# Altium PCB Tray2.PcbDoc (part 5 of 6)
Units mil, origin at the board's own origin, x right, y up, seen from the top; angles counter-clockwise.
Board outline 6000 x 4000 mil, 2 copper layers (Top Layer, Bottom Layer); 418 components, 415 nets, 1799 pads, 870 vias.
Unrouted connection lines stored in the file: 363.
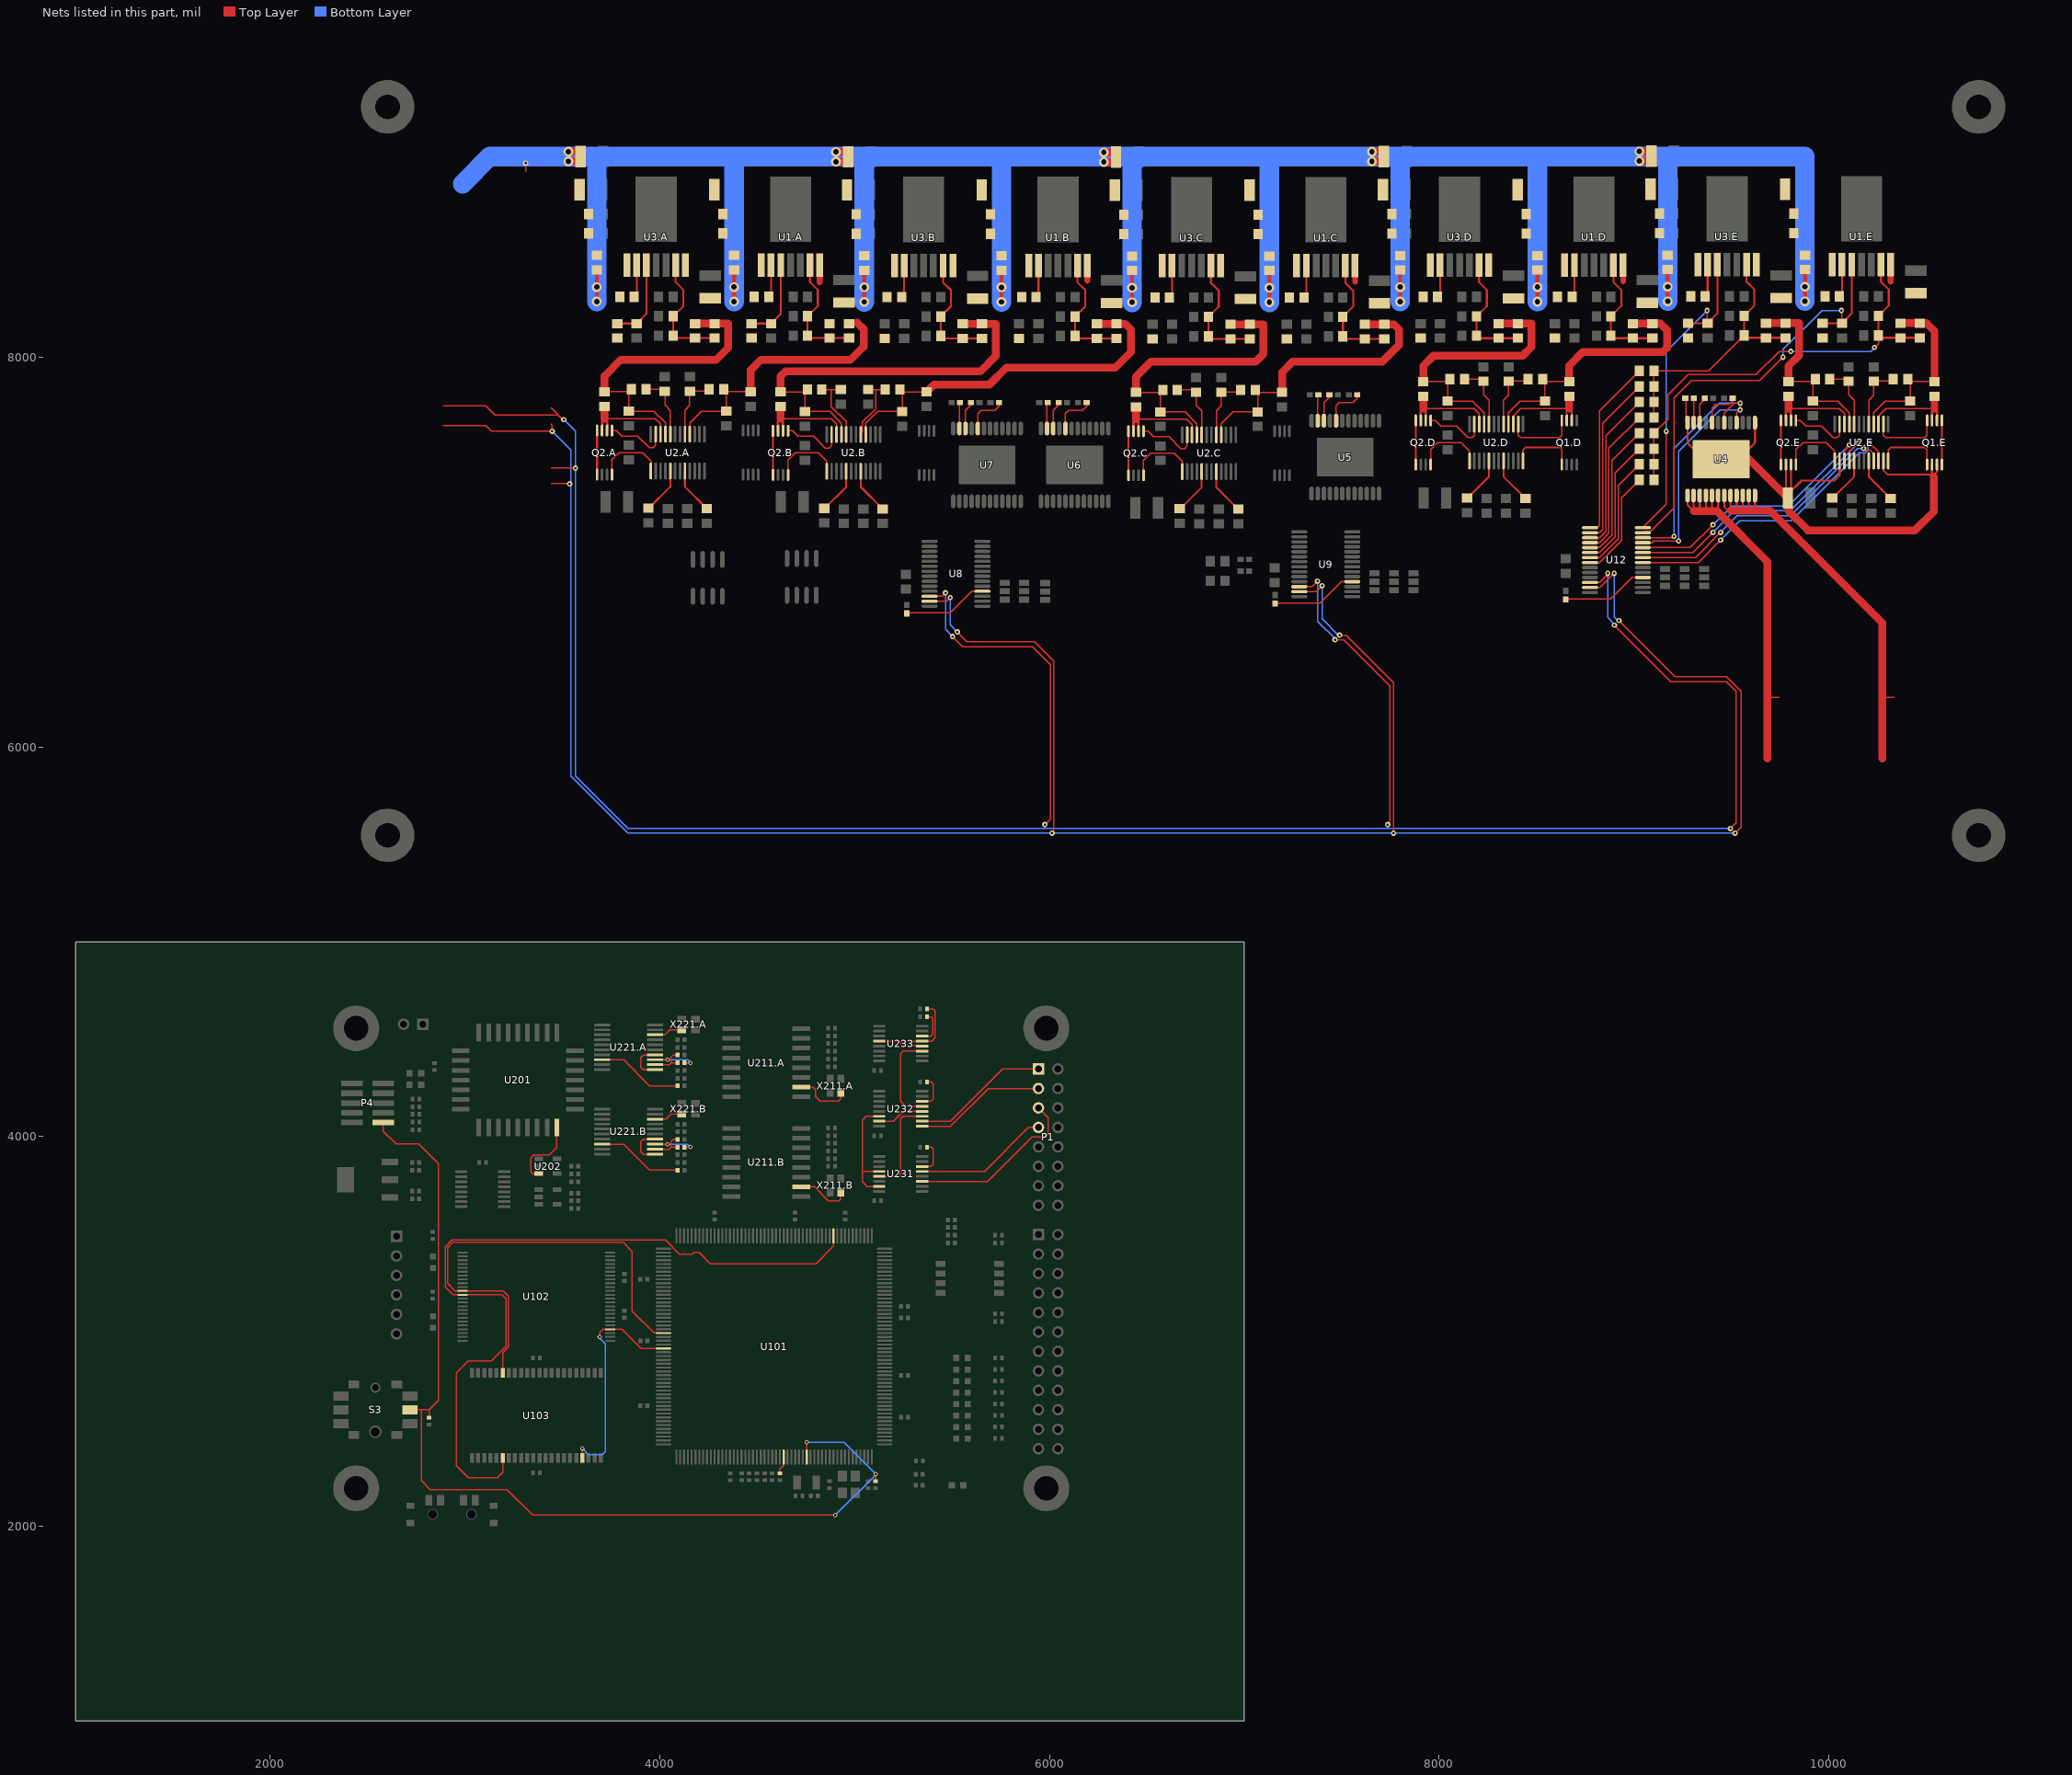
[diagram p5: the nets of this part, all layers, seen from the top]

## Via types
v1: diameter 21.65, hole 11.81, Top Layer to Bottom Layer, tented both sides, 370 vias
v2: diameter 27.56, hole 11.81, Top Layer to Bottom Layer, tented both sides, 231 vias
v3: diameter 27.56, hole 11.81, Top Layer to Bottom Layer, tented bottom, 120 vias
v4: diameter 25.98, hole 12.99, Top Layer to Bottom Layer, tented both sides, 96 vias
v5: diameter 50, hole 28, Top Layer to Bottom Layer, tented both sides, 40 vias
v6: diameter 21.65, hole 13.78, Top Layer to Bottom Layer, 13 vias

## Nets (pads, with @x,y where several pads share a name; then routed paths per layer and width w, separated by ;. In a path a pad name is that pad's centre, name@x,y a point inside that pad or via, vN(x,y) a via of type N, cw(c..) or ccw(c..) an arc to the next point about the centre after c; other vN are vias at no path point) (continued)
NetQ1.D_G1: Q1.D.G1 U2.D.2 | length 367.7
  Top Layer w8: U2.D.2@8407.18,7658.19 8407.18,7601.2 8419.69,7588.7 8619.69,7588.7 8631.3,7600.31 Q1.D.G1@8631.3,7676.89
NetQ1.D_G2: Q1.D.G2 U2.D.24 | length 342.7
  Top Layer w8: U2.D.24@8432.18,7469.21 8432.19,7526.2 8444.69,7538.7 8619.69,7538.7 8631.3,7527.09 Q1.D.G2@8631.3,7450.51
NetQ1.D_S1: Q1.D.S1 R1.D.2 U2.D.3 | length 542.9
  Top Layer w6: U2.D.3@8382.18,7658.19 8382.18,7701.2 8419.68,7738.7 8669.68,7738.7
  Top Layer w10: Q1.D.S1@8656.89,7676.89 8656.89,7725.91 8669.68,7738.7 8682.48,7725.91 Q1.D.S1@8682.48,7676.89
  Top Layer w40: 8669.68,7738.7 R1.D.2@8669.68,7801.3
NetQ1.E_D1: Q1.E.D1 Q1.E.D2 | length 226.4
  Top Layer w10: Q1.E.D2@10583.15,7450.51 Q1.E.D1@10583.15,7676.89
NetQ1.E_G1: Q1.E.G1 U2.E.2 | length 367.7
  Top Layer w8: U2.E.2@10282.27,7658.19 10282.26,7601.2 10294.77,7588.7 10494.77,7588.7 10506.38,7600.32 Q1.E.G1@10506.38,7676.89
NetQ1.E_G2: Q1.E.G2 U2.E.24 | length 342.7
  Top Layer w8: U2.E.24@10307.27,7469.21 10307.27,7526.2 10319.77,7538.7 10494.77,7538.7 10506.38,7527.09 Q1.E.G2@10506.38,7450.51
NetQ1.E_S1: Q1.E.S1 R1.E.2 U2.E.3 | length 542.9
  Top Layer w6: U2.E.3@10257.27,7658.19 10257.26,7701.2 10294.76,7738.7 10544.76,7738.7
  Top Layer w10: Q1.E.S1@10531.97,7676.89 10531.97,7725.91 10544.76,7738.7 10557.56,7725.91 Q1.E.S1@10557.56,7676.89
  Top Layer w40: 10544.76,7738.7 R1.E.2@10544.76,7801.3
NetQ2.A_D1: Q2.A.D1 Q2.A.D2 | length 231.4
  Top Layer w10: Q2.A.D1@3677.8,7398.94 Q2.A.D2@3677.8,7630.32
NetQ2.A_G1: Q2.A.G1 U2.A.13 | length 360.4
  Top Layer w6: Q2.A.G1@3754.57,7398.94 3754.57,7475.51 3791.18,7512.13 3911.18,7512.13 3953.68,7469.63 U2.A.13@3953.68,7417.64
NetQ2.A_G2: Q2.A.G2 U2.A.11 | length 322.8
  Top Layer w6: Q2.A.G2@3754.57,7625.31 3777.99,7625.32 3806.18,7597.13 3886.18,7597.13 3946.18,7537.13 3966.18,7537.13 3978.68,7549.63 U2.A.11@3978.68,7606.61
NetQ2.A_S2: Q2.A.S2 R12.A.2 U2.A.10 | length 548.7
  Top Layer w6: 3716.18,7687.13 3976.18,7687.13 4003.68,7659.63 U2.A.10@4003.68,7606.61
  Top Layer w12: Q2.A.S2@3703.39,7625.31 3703.39,7674.33 3716.18,7687.13 3728.98,7674.33 Q2.A.S2@3728.98,7625.31
  Top Layer w40: 3716.18,7687.13 R12.A.2@3716.18,7749.73
NetQ2.B_D1: Q2.B.D1 Q2.B.D2 | length 231.4
  Top Layer w10: Q2.B.D1@4581.14,7397.44 Q2.B.D2@4581.14,7628.82
NetQ2.B_G1: Q2.B.G1 U2.B.13 | length 360.4
  Top Layer w6: Q2.B.G1@4657.91,7397.44 4657.92,7474.02 4694.53,7510.63 4814.53,7510.63 4857.03,7468.13 U2.B.13@4857.03,7416.14
NetQ2.B_G2: Q2.B.G2 U2.B.11 | length 322.8
  Top Layer w6: Q2.B.G2@4657.91,7623.82 4681.34,7623.82 4709.53,7595.63 4789.53,7595.63 4849.53,7535.63 4869.53,7535.63 4882.03,7548.13 U2.B.11@4882.03,7605.12
NetQ2.B_S2: Q2.B.S2 R12.B.2 U2.B.10 | length 548.7
  Top Layer w6: 4619.53,7685.63 4879.53,7685.63 4907.03,7658.13 U2.B.10@4907.03,7605.12
  Top Layer w12: Q2.B.S2@4606.73,7623.82 4606.73,7672.84 4619.53,7685.63 4632.32,7672.84 Q2.B.S2@4632.32,7623.82
  Top Layer w40: 4619.53,7685.63 R12.B.2@4619.53,7748.23
NetQ2.C_D1: Q2.C.D1 Q2.C.D2 | length 231.4
  Top Layer w10: Q2.C.D1@6406.38,7395.51 Q2.C.D2@6406.38,7626.89
NetQ2.C_G1: Q2.C.G1 U2.C.13 | length 360.4
  Top Layer w6: Q2.C.G1@6483.15,7395.51 6483.15,7472.09 6519.77,7508.7 6639.77,7508.7 6682.27,7466.2 U2.C.13@6682.27,7414.21
NetQ2.C_G2: Q2.C.G2 U2.C.11 | length 322.8
  Top Layer w6: Q2.C.G2@6483.15,7621.89 6506.57,7621.89 6534.76,7593.7 6614.77,7593.7 6674.77,7533.7 6694.77,7533.7 6707.27,7546.2 U2.C.11@6707.27,7603.19
NetQ2.C_S2: Q2.C.S2 R12.C.2 U2.C.10 | length 548.7
  Top Layer w6: 6444.76,7683.7 6704.76,7683.7 6732.26,7656.2 U2.C.10@6732.27,7603.19
  Top Layer w12: Q2.C.S2@6431.97,7621.89 6431.97,7670.91 6444.76,7683.7 6457.56,7670.91 Q2.C.S2@6457.56,7621.89
  Top Layer w40: 6444.76,7683.7 R12.C.2@6444.76,7746.3
NetQ2.D_D1: Q2.D.D1 Q2.D.D2 | length 231.4
  Top Layer w10: Q2.D.D1@7881.3,7450.51 Q2.D.D2@7881.3,7681.89
NetQ2.D_G1: Q2.D.G1 U2.D.13 | length 360.4
  Top Layer w6: Q2.D.G1@7958.07,7450.51 7958.07,7527.09 7994.69,7563.7 8114.69,7563.7 8157.19,7521.2 U2.D.13@8157.18,7469.21
NetQ2.D_G2: Q2.D.G2 U2.D.11 | length 322.8
  Top Layer w6: Q2.D.G2@7958.07,7676.89 7981.49,7676.89 8009.68,7648.7 8089.69,7648.7 8149.69,7588.7 8169.69,7588.7 8182.19,7601.2 U2.D.11@8182.18,7658.19
NetQ2.D_S2: Q2.D.S2 R12.D.2 U2.D.10 | length 548.7
  Top Layer w6: 7919.68,7738.7 8179.68,7738.7 8207.18,7711.2 U2.D.10@8207.18,7658.19
  Top Layer w12: Q2.D.S2@7906.89,7676.89 7906.89,7725.9 7919.68,7738.7 7932.48,7725.9 Q2.D.S2@7932.48,7676.89
  Top Layer w40: 7919.68,7738.7 R12.D.2@7919.68,7801.3
NetQ2.E_D1: Q2.E.D1 Q2.E.D2 | length 231.4
  Top Layer w10: Q2.E.D1@9756.38,7450.51 Q2.E.D2@9756.38,7681.89
NetQ2.E_G1: Q2.E.G1 U2.E.13 | length 360.4
  Top Layer w6: Q2.E.G1@9833.15,7450.51 9833.15,7527.09 9869.77,7563.7 9989.77,7563.7 10032.27,7521.2 U2.E.13@10032.27,7469.21
NetQ2.E_G2: Q2.E.G2 U2.E.11 | length 322.8
  Top Layer w6: Q2.E.G2@9833.15,7676.89 9856.57,7676.89 9884.76,7648.7 9964.77,7648.7 10024.77,7588.7 10044.77,7588.7 10057.27,7601.2 U2.E.11@10057.27,7658.19
NetQ2.E_S2: Q2.E.S2 R12.E.2 U2.E.10 | length 548.7
  Top Layer w6: 9794.76,7738.7 10054.76,7738.7 10082.26,7711.2 U2.E.10@10082.27,7658.19
  Top Layer w12: Q2.E.S2@9781.97,7676.89 9781.97,7725.91 9794.76,7738.7 9807.56,7725.91 Q2.E.S2@9807.56,7676.89
  Top Layer w40: 9794.76,7738.7 R12.E.2@9794.76,7801.3
NetR2.A_2: R2.A.2 R3.A.2 U2.A.5 | length 316
  Top Layer w6: U2.A.5@4128.68,7606.61 4128.68,7729.63 4153.58,7754.53 4153.58,7827.13 R2.A.2@4238.78,7827.13
NetR2.B_2: R2.B.2 R3.B.2 U2.B.5 | length 364.1
  Top Layer w6: U2.B.5@5032.03,7605.12 5026.5,7605.12 5041.14,7619.76 5041.14,7669.83 5105.26,7733.95 5105.26,7734.28 5109.69,7738.7 5109.69,7835.63 ; R3.B.2@5069.69,7829.5 R3.B.2@5069.69,7836.1 ; R3.B.2@5070.16,7835.63 5109.69,7835.63 ; R2.B.2@5157.13,7835.63 5109.69,7835.63
NetR2.C_2: R2.C.2 R3.C.2 U2.C.5 | length 316
  Top Layer w6: U2.C.5@6857.27,7603.19 6857.26,7726.2 6882.17,7751.1 6882.17,7823.7 R2.C.2@6967.36,7823.7
NetR2.D_2: R2.D.2 R3.D.2 U2.D.5 | length 316
  Top Layer w6: U2.D.5@8332.18,7658.19 8332.18,7781.2 8357.09,7806.1 8357.09,7878.7 R2.D.2@8442.28,7878.7
NetR2.E_2: R2.E.2 R3.E.2 U2.E.5 | length 316
  Top Layer w6: U2.E.5@10207.27,7658.19 10207.26,7781.2 10232.17,7806.1 10232.17,7878.7 R2.E.2@10317.36,7878.7
NetR4.A_1: R4.A.1 U1.A.2 | length 167.6
  Top Layer w10: R4.A.1@4558.58,8312.13 4571.18,8324.73 U1.A.2@4571.18,8474.53
NetR4.B_1: R4.B.1 U1.B.2 | length 167.6
  Top Layer w10: R4.B.1@5931.93,8310.63 5944.53,8323.23 U1.B.2@5944.53,8473.03
NetR4.C_1: R4.C.1 U1.C.2 | length 167.6
  Top Layer w10: R4.C.1@7307.17,8308.7 7319.77,8321.3 U1.C.2@7319.76,8471.1
NetR4.D_1: R4.D.1 U1.D.2 | length 167.6
  Top Layer w10: R4.D.1@8683.54,8311.77 8696.14,8324.37 U1.D.2@8696.14,8474.17
NetR4.E_1: R4.E.1 U1.E.2 | length 167.6
  Top Layer w10: R4.E.1@10057.17,8313.7 10069.77,8326.3 U1.E.2@10069.76,8476.1
NetR10.A_2: R10.A.2 R11.A.2 U2.A.8 | length 320.2
  Top Layer w6: R11.A.2@3943.58,7837.13 4018.78,7837.13 4026.18,7829.73 4026.18,7757.13 4053.68,7729.63 U2.A.8@4053.68,7606.61
NetR10.B_2: R10.B.2 R11.B.2 U2.B.8 | length 354.8
  Top Layer w6: R11.B.2@4846.93,7835.63 4879.69,7835.63 ; R10.B.2@4929.53,7828.23 4922.13,7835.63 4879.69,7835.63 ; R10.B.2@4929.53,7829.5 R10.B.2@4929.53,7836.1 ; U2.B.8@4957.03,7605.12 4957.03,7670.87 4879.69,7748.22 4879.69,7835.63
NetR10.C_2: R10.C.2 R11.C.2 U2.C.8 | length 320.2
  Top Layer w6: R11.C.2@6672.17,7833.7 6747.36,7833.7 6754.76,7826.3 6754.76,7753.7 6782.26,7726.2 U2.C.8@6782.27,7603.19
NetR10.D_2: R10.D.2 R11.D.2 U2.D.8 | length 320.2
  Top Layer w6: R11.D.2@8147.09,7888.7 8222.28,7888.7 8229.68,7881.3 8229.68,7808.7 8257.18,7781.2 U2.D.8@8257.18,7658.19
NetR10.E_2: R10.E.2 R11.E.2 U2.E.8 | length 320.2
  Top Layer w6: R11.E.2@10022.17,7888.7 10097.36,7888.7 10104.76,7881.3 10104.76,7808.7 10132.26,7781.2 U2.E.8@10132.27,7658.19
NetR13.A_1: R13.A.1 U3.A.2 | length 175
  Top Layer w10: R13.A.1@3868.58,8312.13 3881.18,8312.13 U3.A.2@3881.18,8474.53
NetR13.B_1: R13.B.1 U3.B.2 | length 175
  Top Layer w10: R13.B.1@5241.93,8310.63 5254.53,8310.63 U3.B.2@5254.53,8473.03
NetR13.C_1: R13.C.1 U3.C.2 | length 175
  Top Layer w10: R13.C.1@6617.17,8308.7 6629.76,8308.7 U3.C.2@6629.76,8471.1
NetR13.D_1: R13.D.1 U3.D.2 | length 175
  Top Layer w10: R13.D.1@7993.54,8311.77 8006.14,8311.77 U3.D.2@8006.14,8474.17
NetR13.E_1: R13.E.1 U3.E.2 | length 175
  Top Layer w10: R13.E.1@9367.17,8313.7 9379.76,8313.7 U3.E.2@9379.76,8476.1
NetR19_2: R19.2 U4.CS_DIS | length 129.6
  Top Layer w6: U4.CS_DIS@9307.95,7665.71 R19.2@9307.95,7795.31
NetR20_2: R20.2 U5.CS_DIS | length 129.6
  Top Layer w6: U5.CS_DIS@7377.95,7675.71 R20.2@7377.95,7805.31
NetR21_1: R21.1 U4.CS2 | length 144.8
  Top Layer w6: U4.CS2@9339.45,7665.71 9339.45,7758.46 9368.03,7787.05 R21.1@9368.03,7798.7
NetR22_1: R22.1 U4.CS1 | length 219.1
  Top Layer w6: U4.CS1@9402.44,7665.71 9402.44,7741.46 9419.69,7758.7 9489.69,7758.7 9511.34,7780.35 R22.1@9511.34,7798.7
NetR23_1: R23.1 U5.CS2 | length 144.8
  Top Layer w6: U5.CS2@7409.45,7675.71 7409.45,7768.46 7438.03,7797.05 R23.1@7438.03,7808.7
NetR24_1: R24.1 U5.CS1 | length 219.1
  Top Layer w6: U5.CS1@7472.44,7675.71 7472.44,7751.46 7489.69,7768.7 7559.69,7768.7 7581.34,7790.35 R24.1@7581.34,7808.7
NetR25_2: R25.2 U6.CS_DIS | length 129.6
  Top Layer w6: U6.CS_DIS@5987.95,7635.71 R25.2@5987.95,7765.31
NetR26_2: R26.2 U7.CS_DIS | length 129.6
  Top Layer w6: U7.CS_DIS@5537.95,7635.71 R26.2@5537.95,7765.31
NetR27_1: R27.1 U6.CS2 | length 144.8
  Top Layer w6: U6.CS2@6019.45,7635.71 6019.45,7728.46 6048.03,7757.05 R27.1@6048.03,7768.7
NetR28_1: R28.1 U6.CS1 | length 219.1
  Top Layer w6: U6.CS1@6082.44,7635.71 6082.44,7711.46 6099.69,7728.7 6169.69,7728.7 6191.34,7750.35 R28.1@6191.34,7768.7
NetR29_1: R29.1 U7.CS2 | length 144.8
  Top Layer w6: U7.CS2@5569.45,7635.71 5569.45,7728.46 5598.03,7757.05 R29.1@5598.03,7768.7
NetR30_1: R30.1 U7.CS1 | length 219.1
  Top Layer w6: U7.CS1@5632.44,7635.71 5632.44,7711.46 5649.69,7728.7 5719.69,7728.7 5741.34,7750.35 R30.1@5741.34,7768.7
NetR31_2: R31.2 U8.18 | length 442.3
  Top Layer w6: R31.2@5260.63,6687.99 5262.28,6689.65 5490.63,6689.65 5601.06,6800.08 U8.18@5656.46,6800.08
NetR32_2: R32.2 U9.18 | length 442.3
  Top Layer w6: R32.2@7159.45,6737.05 7161.1,6738.7 7389.45,6738.7 7499.88,6849.13 U9.18@7555.28,6849.13
NetR35_1: R35.1 U12.7 | length 612.4
  Top Layer w6: U12.7@8775.99,6972.92 8824.8,6972.92 8921.01,7069.12 8921.01,7343.09 R35.1@9029.61,7451.69
NetR36_1: R36.1 U12.8 | length 558
  Top Layer w6: U12.8@8775.99,6947.33 8824.8,6947.33 8937.01,7059.53 8937.01,7240.67 8937.01,7279.09 R36.1@9029.61,7371.69
NetR37_1: R37.1 U12.6 | length 666.8
  Top Layer w6: U12.6@8775.99,6998.51 8824.8,6998.51 8905.01,7078.71 8905.01,7407.09 R37.1@9029.61,7531.69
NetR38_1: R38.1 U12.5 | length 721.2
  Top Layer w6: U12.5@8775.99,7024.1 8824.8,7024.1 8889.01,7088.3 8889.01,7471.09 R38.1@9029.61,7611.69
NetR39_1: R39.1 U12.4 | length 775.6
  Top Layer w6: U12.4@8775.99,7049.69 8824.8,7049.69 8873.01,7097.89 8873.01,7535.09 R39.1@9029.61,7691.69
NetR40_1: R40.1 U12.3 | length 830.1
  Top Layer w6: U12.3@8775.99,7075.28 8824.8,7075.28 8857.01,7107.48 8857.01,7599.09 R40.1@9029.61,7771.69
NetR41_1: R41.1 U12.2 | length 884.5
  Top Layer w6: U12.2@8775.99,7100.87 8824.8,7100.87 8841.01,7117.07 8841.01,7663.09 R41.1@9029.61,7851.69
NetR42_1: R42.1 U12.1 | length 931.8
  Top Layer w6: U12.1@8775.99,7126.46 8812.77,7126.46 8825.01,7138.69 8825.01,7710.02 8825.01,7727.09 R42.1@9029.61,7931.69
NetR43_2: R43.2 U12.18 | length 442.3
  Top Layer w6: R43.2@8651.82,6758.47 8653.47,6760.12 8881.82,6760.12 8992.25,6870.55 U12.18@9047.65,6870.55
NetR44.A_1: R44.A.1 U2.A.20 | length 239.7
  Top Layer w10: U2.A.20@4128.68,7417.64 4128.68,7337.03 R44.A.1@4241.18,7224.53
NetR44.B_1: R44.B.1 U2.B.20 | length 239.7
  Top Layer w10: U2.B.20@5032.03,7416.14 5032.03,7335.53 R44.B.1@5144.53,7223.03
NetR44.C_1: R44.C.1 U2.C.20 | length 239.7
  Top Layer w10: U2.C.20@6857.27,7414.21 6857.27,7333.6 R44.C.1@6969.76,7221.1
NetR44.D_1: R44.D.1 U2.D.20 | length 239.7
  Top Layer w10: U2.D.20@8332.18,7469.21 8332.19,7388.6 R44.D.1@8444.68,7276.1
NetR44.E_1: R44.E.1 U2.E.20 | length 239.7
  Top Layer w10: U2.E.20@10207.27,7469.21 10207.27,7388.6 R44.E.1@10319.76,7276.1
NetR45.A_1: R45.A.1 U2.A.17 | length 239.7
  Top Layer w10: R45.A.1@3941.18,7224.53 4053.68,7337.03 U2.A.17@4053.68,7417.64
NetR45.B_1: R45.B.1 U2.B.17 | length 239.7
  Top Layer w10: R45.B.1@4844.53,7223.03 4957.03,7335.53 U2.B.17@4957.03,7416.14
NetR45.C_1: R45.C.1 U2.C.17 | length 239.7
  Top Layer w10: R45.C.1@6669.76,7221.1 6782.26,7333.6 U2.C.17@6782.27,7414.21
NetR45.D_1: R45.D.1 U2.D.17 | length 239.7
  Top Layer w10: R45.D.1@8144.68,7276.1 8257.18,7388.6 U2.D.17@8257.18,7469.21
NetR45.E_1: R45.E.1 U2.E.17 | length 239.7
  Top Layer w10: R45.E.1@10019.76,7276.1 10132.26,7388.6 U2.E.17@10132.27,7469.21
NetR101_1: R101.1 U101.29 | length 91.8
  Top Layer w5.91: R101.1@4616.22,2270.79 4616.22,2292.44 4635.91,2312.13 U101.29@4635.91,2354.45
NetR221.A_2: R221.A.2 R223.A.1 U221.A.2 | length 212.7
  Top Layer w5.91: U221.A.2@3948.9,4368.23 U221.A.2@3975.47,4368.23 ; U221.A.2@3974.49,4369.21 U221.A.2@3975.47,4368.23 ; R223.A.1@4090.63,4379.06 4059.13,4379.06 ; R221.A.2@4090.63,4418.43 4068.98,4418.43 4059.13,4408.58 4059.13,4379.06 ; U221.A.2@3975.47,4368.23 4048.31,4368.23 4059.13,4379.06
NetR221.B_2: R221.B.2 R223.B.1 U221.B.2 | length 185.7
  Top Layer w5.91: U221.B.2@3974.49,3935.16 4048.31,3935.16 4059.13,3945.98 ; R223.B.1@4090.63,3945.98 4059.13,3945.98 ; R221.B.2@4090.63,3985.35 4068.98,3985.35 4059.13,3975.51 4059.13,3945.98
NetR222.A_2: R222.A.2 U221.A.18 | length 417.2
  Top Layer w5.91: U221.A.18@3728.43,4393.82 3814.06,4393.82 3946.93,4260.94 R222.A.2@4090.63,4260.94
NetR222.B_2: R222.B.2 U221.B.18 | length 417.2
  Top Layer w5.91: U221.B.18@3728.43,3960.75 3814.06,3960.75 3946.93,3827.87 R222.B.2@4090.63,3827.87
NetR223.A_2: R223.A.2 U221.A.3 | length 277.2
  Top Layer w5.91: U221.A.3@3948.9,4393.82 U221.A.3@4005,4393.82 ; U221.A.3@3974.49,4394.8 4037.48,4394.8 v1(4038.46,4393.82) ; R223.A.2@4126.06,4379.06 v1(4157.56,4379.06)
  Bottom Layer w5.91: v1(4038.46,4393.82) 4142.8,4393.82 v1(4157.56,4379.06)
NetR223.B_2: R223.B.2 U221.B.3 | length 220.7
  Top Layer w5.91: U221.B.3@3974.49,3960.75 v1(4038.46,3960.75) ; R223.B.2@4126.06,3945.98 v1(4157.56,3945.98)
  Bottom Layer w5.91: v1(4038.46,3960.75) 4142.8,3960.75 v1(4157.56,3945.98)
NetR231_1: R231.1 U231.6 | length 175.9
  Top Layer w5.91: U231.6@5346.54,3846.57 5392.8,3846.57 5403.62,3857.4 5403.62,3936.14 5393.78,3945.98 R231.1@5372.13,3945.98
NetR232_1: R232.1 U232.6 | length 175.9
  Top Layer w5.91: U232.6@5346.54,4181.22 5392.8,4181.22 5403.62,4192.05 5403.62,4270.79 5393.78,4280.63 R232.1@5372.13,4280.63
NetR233_1: R233.1 U233.6 | length 174.3
  Top Layer w5.91: U233.6@5346.54,4515.87 5392.8,4515.87 5401.65,4524.72 5401.65,4607.4 5393.78,4615.28 R233.1@5372.13,4615.28
NetR234_2: R234.2 U233.4 U233.5 U233.12 | length 605.9
  Top Layer w5.91: U233.12@5126.06,4490.28 5236.3,4490.28 ; U233.4@5346.54,4464.69 5249.09,4464.69 5236.3,4477.48 5236.3,4490.28 ; R234.2@5372.13,4654.65 5403.62,4654.65 5413.46,4644.8 5413.46,4507.01 5396.73,4490.28 U233.5@5346.54,4490.28 5236.3,4490.28
NetU211.A_2: U211.A.2 X211.A.3 | length 290.8
  Top Layer w5.91: U211.A.2@4726.46,4254.06 4787.48,4254.06 4800.28,4241.26 4800.28,4204.84 4822.91,4182.2 4918.39,4182.2 4929.21,4193.03 X211.A.3@4929.21,4225.51
NetU211.B_2: U211.B.2 X211.B.3 | length 270.1
  Top Layer w5.91: U211.B.2@4726.46,3742.24 4793.65,3742.24 4865.5,3670.39 4919.37,3670.39 4929.21,3680.24 X211.B.3@4929.21,3713.7
NetU221.A_1: U221.A.1 U221.A.4 | length 154.3
  Top Layer w5.91: U221.A.1@3948.9,4342.64 3915.43,4342.64 3902.64,4355.43 3902.64,4406.61 3915.43,4419.41 U221.A.4@3948.9,4419.41
NetU221.A_8: U221.A.8 X221.A.3 | length 148.8
  Top Layer w5.91: U221.A.8@3974.49,4521.77 4024.68,4521.77 4051.26,4548.35 X221.A.3@4112.28,4548.35
NetU221.B_1: U221.B.1 U221.B.4 | length 154.3
  Top Layer w5.91: U221.B.1@3948.9,3909.57 3915.43,3909.57 3902.64,3922.36 3902.64,3973.54 3915.43,3986.34 U221.B.4@3948.9,3986.34
NetU221.B_8: U221.B.8 X221.B.3 | length 190.3
  Top Layer w5.91: U221.B.8@3948.9,4088.7 U221.B.8@3991.22,4088.7 ; U221.B.8@3974.49,4090.67 4032.56,4090.67 4057.17,4115.28 X221.B.3@4112.28,4115.28
NetU231_12: U231.12 U231.15 U232.14 | length 593.6
  Top Layer w5.91: U231.15@5126.06,3744.21 5064.06,3744.21 5039.45,3768.82 5039.45,3820.98 ; U231.12@5126.06,3820.98 5039.45,3820.98 ; U232.14@5126.06,4104.45 5060.12,4104.45 5039.45,4083.78 5039.45,3820.98
NetU232_4: U232.4 U232.15 | length 241.7
  Top Layer w5.91: U232.15@5126.06,4078.86 5197.91,4078.86 5249.09,4130.04 U232.4@5346.54,4130.04
OE: U101.183 U102.28 U103.41 | length 1185.6
  Top Layer w5.91: U103.41@3602.44,2349.53 v1(3602.44,2398.74) ; v1(3691.02,2971.57) 3691.02,2972.56 3692.01,2972.56 3692.01,2993.93 3709.02,3010.95 U102.28@3745.16,3010.95 3805.2,3010.95 3903.62,2912.52 U101.183@4018.78,2912.52
  Bottom Layer w5.91: v1(3602.44,2398.74) 3633.94,2367.24 3704.8,2367.24 3720.55,2382.99 3720.55,2935.24 3691.02,2964.77 v1(3691.02,2971.57)
PS: U101.115 U102.12 U103.28 | length 4078.5
  Top Layer w5.91: U103.28@3192.99,2349.53 3192.99,2276.69 3164.45,2248.15 3016.81,2248.15 2955.79,2309.17 2955.79,2787.52 3015.83,2847.56 3133.94,2847.56 3181.18,2894.8 3181.18,2895.76 3209.72,2924.3 3209.72,3167.44 3189.05,3188.11 U102.12@2987.28,3188.11 2938.07,3188.11 2897.72,3228.46 2897.72,3434.23 2932.11,3468.62 4028.62,3468.62 4101.46,3395.79 4167.68,3395.79 4176.54,3404.65 4201.15,3404.65 4212.68,3393.11 4212.68,3392.83 4257.95,3347.56 4801.26,3347.56 4891.81,3438.11 U101.115@4891.81,3490.28
R\E\S\E\T\: P4.10 R50.2 R102.1 S3.5 U101.35 | length 5214.2
  Top Layer w5.91: P4.10@2580.08,4072.36 2580.08,4027.4 2645.75,3961.73 2762.87,3961.73 2862.28,3862.32 2862.28,2644.8 2815.04,2597.56 ; S3.5@2716.61,2597.56 2775.67,2597.56 ; R50.2@2815.04,2556.22 2815.04,2597.56 ; U101.35@4754.02,2354.45 v1(4754.02,2430.24) ; v1(4901.65,2056.22) 3346.54,2056.22 3214.65,2188.11 2820.94,2188.11 2775.67,2233.39 2775.67,2597.56 ; R102.1@5108.35,2231.42 v1(5108.35,2267.83) ; 2775.67,2597.56 2815.04,2597.56
  Bottom Layer w5.91: v1(4754.02,2430.24) 4945.94,2430.24 v1(5108.35,2267.83) 5108.35,2262.91 v1(4901.65,2056.22)
RADIOS.RX1: P1.7 U231.5 | length 691.3
  Top Layer w5.91: U231.5@5346.54,3820.98 5667.4,3820.98 5893.58,4047.17 P1.7@5944.17,4047.17
RADIOS.RX2: P1.5 U231.3 | length 899.3
  Top Layer w5.91: U231.3@5346.54,3769.8 5683.15,3769.8 5911.5,3998.15 5972.52,3998.15 5994.17,4019.8 5994.17,4097.17 P1.5@5944.17,4147.17
RADIOS.TX1: P1.1 U232.2 | length 708.8
  Top Layer w5.91: U232.2@5346.54,4078.86 5428.23,4078.86 5492.2,4078.86 5760.51,4347.17 P1.1@5944.17,4347.17
RADIOS.TX2: P1.3 U232.1 | length 678
  Top Layer w5.91: U232.1@5346.54,4053.27 5492.2,4053.27 5686.1,4247.17 P1.3@5944.17,4247.17
REG1_EN.A: R6.A.2 R9.A.1 U1.A.3 | length 420.7
  Top Layer w10: R6.A.2@4471.18,8174.53 R9.A.1@4571.18,8174.53 4621.18,8224.53 U1.A.3@4621.18,8474.53
REG1_FB.A: C5.A.1 R5.A.1 R7.A.2 R8.A.2 U1.A.6 | length 618.5
  Top Layer w10: U1.A.6@4771.18,8474.53 4771.18,8387.13 4811.18,8347.13 4811.18,8264.73 R7.A.2@4758.58,8212.13 R8.A.2@4758.58,8112.13 4770.98,8099.72 R5.A.1@4871.18,8099.72 C5.A.1@4971.18,8099.72
REG1_FB.B: C5.B.1 R5.B.1 R7.B.2 R8.B.2 U1.B.6 | length 618.5
  Top Layer w10: U1.B.6@6144.53,8473.03 6144.53,8385.63 6184.53,8345.63 6184.53,8263.23 R7.B.2@6131.93,8210.63 R8.B.2@6131.93,8110.63 6144.33,8098.23 R5.B.1@6244.53,8098.23 C5.B.1@6344.53,8098.23
REG1_FB.C: C5.C.1 R5.C.1 R7.C.2 R8.C.2 U1.C.6 | length 618.5
  Top Layer w10: U1.C.6@7519.76,8471.1 7519.77,8383.7 7559.76,8343.7 7559.76,8261.3 R7.C.2@7507.17,8208.7 R8.C.2@7507.17,8108.7 7519.57,8096.3 R5.C.1@7619.76,8096.3 C5.C.1@7719.76,8096.3
REG1_FB.D: C5.D.1 R5.D.1 R7.D.2 R8.D.2 U1.D.6 | length 618.5
  Top Layer w10: U1.D.6@8896.14,8474.17 8896.14,8386.77 8936.14,8346.77 8936.14,8264.37 R7.D.2@8883.54,8211.77 R8.D.2@8883.54,8111.77 8895.94,8099.37 R5.D.1@8996.14,8099.37 C5.D.1@9096.14,8099.37
REG2_EN.A: R15.A.2 R18.A.1 U3.A.3 | length 403
  Top Layer w10: R15.A.2@3781.18,8174.53 R18.A.1@3881.18,8174.53 ; R18.A.1@3893.68,8187.03 3931.18,8224.53 U3.A.3@3931.18,8474.53
REG2_FB.A: C14.A.1 R14.A.1 R16.A.2 R17.A.2 U3.A.6 | length 618.5
  Top Layer w10: U3.A.6@4081.18,8474.53 4081.18,8387.13 4121.18,8347.13 4121.18,8264.73 R17.A.2@4068.58,8212.13 R16.A.2@4068.58,8112.13 4080.98,8099.72 R14.A.1@4181.18,8099.72 C14.A.1@4281.18,8099.72
REG2_FB.B: C14.B.1 R14.B.1 R16.B.2 R17.B.2 U3.B.6 | length 618.5
  Top Layer w10: U3.B.6@5454.53,8473.03 5454.53,8385.63 5494.53,8345.63 5494.53,8263.23 R17.B.2@5441.93,8210.63 R16.B.2@5441.93,8110.63 5454.33,8098.23 R14.B.1@5554.53,8098.23 C14.B.1@5654.53,8098.23
REG2_FB.C: C14.C.1 R14.C.1 R16.C.2 R17.C.2 U3.C.6 | length 618.5
  Top Layer w10: U3.C.6@6829.76,8471.1 6829.77,8383.7 6869.76,8343.7 6869.76,8261.3 R17.C.2@6817.17,8208.7 R16.C.2@6817.17,8108.7 6829.57,8096.3 R14.C.1@6929.76,8096.3 C14.C.1@7029.76,8096.3
REG2_FB.D: C14.D.1 R14.D.1 R16.D.2 R17.D.2 U3.D.6 | length 618.5
  Top Layer w10: U3.D.6@8206.14,8474.17 8206.14,8386.77 8246.14,8346.77 8246.14,8264.37 R17.D.2@8193.54,8211.77 R16.D.2@8193.54,8111.77 8205.94,8099.37 R14.D.1@8306.14,8099.37 C14.D.1@8406.14,8099.37
REPEATER: U231.13 U232.3 | length 514.5
  Top Layer w5.91: U231.13@5126.06,3795.39 5223.5,3795.39 5236.3,3808.19 5236.3,4091.65 5249.09,4104.45 U232.3@5346.54,4104.45
SCL: U8.12 U9.12 U12.12 | length 13904
  Top Layer w6: 2887.01,7751.69 3107.01,7751.69 3152.74,7705.96 3471.43,7705.96 ; 3440.66,7433.69 3565.01,7433.69 v2(3567.01,7431.69) ; 3440.87,7741.54 v2@3507.01,7675.39 ; U8.12@5384.8,6774.49 5449.8,6774.49 v2(5467.01,6791.69) ; v2(5503.28,6567.96) 5555.14,6516.1 5912.6,6516.1 6004.8,6423.9 6004.8,5629.49 v2(5977.01,5601.69) ; U9.12@7283.62,6823.54 7348.86,6823.54 v2(7377.01,6851.69) ; v2(7466.1,6550.78) 7511.73,6550.78 7748.91,6313.6 7748.91,5613.6 v2(7737.01,5601.69) ; U12.12@8775.99,6844.96 8824.8,6844.96 8867.01,6887.17 v2(8867.01,6891.69) ; v2(8901.1,6625.78) 9190.77,6336.1 9477.01,6336.1 9527.01,6286.1 9527.01,5611.69 v2(9497.01,5581.69)
  Bottom Layer w6: v2@3512.01,7686.69 3512.01,7676.69 3567.01,7621.69 3567.01,5851.69 3837.01,5581.69 5977.01,5581.69 ; v2(5467.01,6791.69) 5467.01,6604.23 v2(5503.28,6567.96) ; v2(5977.01,5601.69) 5977.01,5581.69 ; v2(7377.01,6851.69) 7377.01,6645.5 7466.1,6556.41 v2(7466.1,6550.78) ; v2(7737.01,5601.69) 7737.01,5581.69 ; v2(8867.01,6891.69) 8867.01,6665.5 8901.1,6631.41 v2(8901.1,6625.78) ; v2(9497.01,5581.69) 7737.01,5581.69 ; 5977.01,5581.69 7737.01,5581.69
  other v2: 3507.01,7681.69
SDA: U8.13 U9.13 U12.13 | length 13873.3
  Top Layer w6: 2887.01,7651.69 3107.01,7651.69 3135.94,7622.76 3447.01,7622.76 3447.01,7653.82 3440.87,7659.96 ; 3440.66,7353.69 3535.01,7353.69 v2(3537.01,7351.69) ; U8.13@5384.8,6748.9 5471.67,6748.9 v2(5490.74,6767.96) ; v2(5527.01,6591.69) 5577.01,6541.69 5923.2,6541.69 6022.9,6441.99 6022.9,5567.58 v2(6013.28,5557.96) ; U9.13@7283.62,6797.95 7370.73,6797.95 v2(7400.74,6827.96) ; v2(7489.83,6574.51) 7524.19,6574.51 7767.01,6331.69 v2(7767.01,5557.96) ; U12.13@8775.99,6819.37 8828.25,6819.37 v2(8900.57,6891.69) ; v2(8924.83,6649.51) 9212.64,6361.69 9477.01,6361.69 9552.6,6286.1 9552.6,5589.82 v2(9520.74,5557.96)
  Bottom Layer w6: v2(3447.01,7621.69) 3543.28,7525.42 3543.28,5851.69 3837.01,5557.96 v2(6013.28,5557.96) v2(9520.74,5557.96) ; v2(5490.74,6767.96) 5490.74,6627.96 v2(5527.01,6591.69) ; v2(7400.74,6827.96) 7400.74,6657.96 7484.19,6574.51 v2(7489.83,6574.51) ; v2(8900.57,6891.69) 8900.57,6668.13 8919.19,6649.51 v2(8924.83,6649.51)
TONE_ON: U201.13 U202.3 | length 372.8
  Top Layer w5.91: U202.3@3378.03,3810.16 3347.8,3810.16 3337.8,3820.16 3337.8,3890.72 3352.71,3905.63 3432.48,3905.63 3470.75,3943.9 U201.13@3470.75,4046.77
TX_DEVICE: U232.5 U233.3 | length 481.5
  Top Layer w5.91: U232.5@5346.54,4155.63 5261.89,4155.63 5236.3,4181.22 5236.3,4426.3 5249.09,4439.09 U233.3@5346.54,4439.09
VBATT: C13.A.1 C13.B.1 C13.C.1 C13.D.1 C13.E.1 FB1.A.2 FB1.B.2 FB1.C.2 FB1.D.2 FB1.E.2 FB2.A.2 FB2.B.2 FB2.C.2 FB2.D.2 FB2.E.2 | length 16464.3
  Top Layer w6: 3310.94,8953.5 v2(3310.94,8997.76)
  Top Layer w20: v5(3676.18,8287.13) v5(3676.18,8362.13) FB2.A.2@3676.18,8449.72 ; v5(4381.18,8287.13) v5(4381.18,8362.13) FB1.A.2@4381.18,8449.73 ; v5(5049.53,8285.63) v5(5049.53,8360.63) FB2.B.2@5049.53,8448.23 ; v5(5754.53,8285.63) v5(5754.53,8360.63) FB1.B.2@5754.53,8448.23 ; v5(6424.76,8283.7) v5(6424.76,8358.7) FB2.C.2@6424.76,8446.3 ; v5(7129.76,8283.7) v5(7129.76,8358.7) FB1.C.2@7129.76,8446.3 ; v5(7801.14,8286.77) v5(7801.14,8361.77) FB2.D.2@7801.14,8449.37 ; v5(8506.14,8286.77) v5(8506.14,8361.77) FB1.D.2@8506.14,8449.37 ; v5(9174.76,8288.7) v5(9174.76,8363.7) FB2.E.2@9174.76,8451.3 ; v5(9879.76,8288.7) v5(9879.76,8363.7) FB1.E.2@9879.76,8451.3
  Top Layer w40: v5(3531.1,9007.13) C13.A.1@3568.11,9007.13 ; v5(3531.1,9057.13) C13.A.1@3568.11,9057.13 ; v5(4904.45,9005.63) C13.B.1@4941.46,9005.63 ; v5(4904.45,9055.63) C13.B.1@4941.46,9055.63 ; v5(6279.69,9003.7) C13.C.1@6316.69,9003.7 ; v5(6279.69,9053.7) C13.C.1@6316.69,9053.7 ; v5(7656.06,9006.77) C13.D.1@7693.07,9006.77 ; v5(7656.06,9056.77) C13.D.1@7693.07,9056.77 ; v5(9029.69,9008.7) C13.E.1@9066.69,9008.7 ; v5(9029.69,9058.7) C13.E.1@9066.69,9058.7
  Bottom Layer w6: v5(3531.1,9007.13) 3531.1,9032.13 v5(3531.1,9057.13)
  Bottom Layer w100: 2987.01,8891.69 3127.44,9032.13 3531.1,9032.13 9174.76,9032.13 ; v5(3676.18,8287.13) v5(3676.18,8362.13) 3676.18,9031.3 ; v5(4381.18,8287.13) v5(4381.18,8362.13) 4381.18,9026.3 ; v5(5049.53,8285.63) v5(5049.53,8360.63) 5049.53,9029.6 ; v5(5754.53,8285.63) v5(5754.53,8360.63) 5754.53,9029.65 ; v5(6424.76,8283.7) v5(6424.76,8358.7) 6424.76,9029.88 ; v5(7129.76,8283.7) v5(7129.76,8358.7) 7129.76,9024.88 ; v5(7801.14,8286.77) v5(7801.14,8361.77) 7801.14,9027.99 ; v5(8506.14,8286.77) v5(8506.14,8361.77) 8506.14,9022.99 ; v5(9174.76,8288.7) v5(9174.76,8363.7) 9174.76,9032.13 ; v5(9879.76,8288.7) v5(9879.76,8363.7) 9879.76,9032.13 9174.76,9032.13
VIN1_BYPASSED.A: C7.A.2 C8.A.2 C9.A.1 FB1.A.1 R4.A.2 R6.A.1 U1.A.1
VIN1_BYPASSED.B: C7.B.2 C8.B.2 C9.B.1 FB1.B.1 R4.B.2 R6.B.1 U1.B.1
VIN1_BYPASSED.C: C7.C.2 C8.C.2 C9.C.1 FB1.C.1 R4.C.2 R6.C.1 U1.C.1
VIN1_BYPASSED.D: C7.D.2 C8.D.2 C9.D.1 FB1.D.1 R4.D.2 R6.D.1 U1.D.1
VIN1_BYPASSED.E: C7.E.2 C8.E.2 C9.E.1 FB1.E.1 R4.E.2 R6.E.1 U1.E.1
VIN2_BYPASSED.A: C15.A.2 C16.A.2 C17.A.1 FB2.A.1 R13.A.2 R15.A.1 U3.A.1
VIN2_BYPASSED.B: C15.B.2 C16.B.2 C17.B.1 FB2.B.1 R13.B.2 R15.B.1 U3.B.1
VIN2_BYPASSED.C: C15.C.2 C16.C.2 C17.C.1 FB2.C.1 R13.C.2 R15.C.1 U3.C.1
VIN2_BYPASSED.D: C15.D.2 C16.D.2 C17.D.1 FB2.D.1 R13.D.2 R15.D.1 U3.D.1
VIN2_BYPASSED.E: C15.E.2 C16.E.2 C17.E.1 FB2.E.1 R13.E.2 R15.E.1 U3.E.1
VREG1.A: C2.A.1 C5.A.2 C11.A.2 R1.A.1 R2.A.1 R5.A.2 U1.A.7 U2.A.4 | length 1461.5
  Top Layer w6: U2.A.4@4153.68,7606.61 4153.68,7664.63 4213.58,7724.53 C2.A.1@4341.18,7724.53 4341.18,7824.53 R1.A.1@4466.18,7824.53
  Top Layer w30: 4821.18,8385.87 U1.A.7@4821.18,8474.53
  Top Layer w40: R1.A.1@4466.18,7824.53 4466.18,7935.2 4519.69,7988.7 4979.69,7988.7 5046.18,8055.2 5046.18,8146.38 5013.7,8178.86
VREG1.B: C2.B.1 C5.B.2 C11.B.2 R1.B.1 R2.B.1 R5.B.2 U1.B.7 U2.B.4 | length 2010.6
  Top Layer w6: U2.B.4@5057.03,7605.12 5057.03,7663.13 5116.93,7723.03 C2.B.1@5244.53,7723.03 5244.53,7823.03 R1.B.1@5369.53,7823.03
  Top Layer w30: 6194.53,8394.17 U1.B.7@6194.53,8473.03
  Top Layer w40: R1.B.1@5369.53,7823.03 5407.19,7860.69 5691.68,7860.69 5779.69,7948.7 6339.53,7948.7 6419.53,8028.7 6419.53,8142.13 6388.62,8173.03 C5.B.2@6344.53,8173.03 R5.B.2@6244.53,8173.03
VREG1.C: C2.C.1 C5.C.2 C11.C.2 R1.C.1 R2.C.1 R5.C.2 U1.C.7 U2.C.4 | length 1605.1
  Top Layer w6: U2.C.4@6882.27,7603.19 6882.26,7661.2 6942.17,7721.1 C2.C.1@7069.76,7721.1 7069.76,7821.1 R1.C.1@7194.76,7821.1
  Top Layer w30: 7569.76,8388.94 U1.C.7@7569.76,8471.1
  Top Layer w40: R1.C.1@7194.76,7821.1 7194.76,7923.78 7249.69,7978.7 7709.69,7978.7 7794.76,8063.78 7794.76,8144.84 7768.5,8171.1 C5.C.2@7719.76,8171.1 R5.C.2@7619.76,8171.1
VREG1.D: C2.D.1 C5.D.2 C11.D.2 R1.D.1 R2.D.1 R5.D.2 U1.D.7 U2.D.4 | length 1478.8
  Top Layer w6: U2.D.4@8357.18,7658.19 8357.18,7716.2 8417.09,7776.1 C2.D.1@8544.68,7776.1 8544.68,7876.1 R1.D.1@8669.68,7876.1
  Top Layer w30: 8946.14,8392.56 U1.D.7@8946.14,8474.17
  Top Layer w40: R1.D.1@8669.68,7876.1 8669.68,7958.7 8739.69,8028.7 9149.69,8028.7 9171.14,8050.16 9171.14,8141.5 9138.46,8174.17 C5.D.2@9096.14,8174.17 R5.D.2@8996.14,8174.17
VREG1.E: C2.E.1 C5.E.2 C11.E.2 R1.E.1 R2.E.1 R5.E.2 U1.E.7 U2.E.4 | length 1034
  Top Layer w6: U2.E.4@10232.27,7658.19 10232.26,7716.2 10292.17,7776.1 C2.E.1@10419.76,7776.1 10419.76,7876.1 R1.E.1@10544.76,7876.1
  Top Layer w30: 10319.76,8388.94 U1.E.7@10319.76,8476.1
  Top Layer w40: R5.E.2@10369.76,8176.1 C5.E.2@10469.76,8176.1 10504.64,8176.1 10544.76,8135.98 R1.E.1@10544.76,7876.1
VREG2.A: C12.A.2 C14.A.2 C19.A.2 R11.A.1 R12.A.1 R14.A.2 U2.A.9 U3.A.7 | length 1620.3
  Top Layer w6: R12.A.1@3716.18,7824.53 R11.A.1@3841.18,7824.53 ; R11.A.1@3856.18,7824.53 R11.A.1@3841.18,7824.53 ; R11.A.1@3868.78,7837.13 R11.A.1@3853.78,7837.13 3841.18,7837.13 R11.A.1@3841.18,7824.53 ; U2.A.9@4028.68,7606.61 4028.68,7664.63 3968.78,7724.53 C12.A.2@3841.18,7724.53 R11.A.1@3841.18,7824.53
  Top Layer w40: R12.A.1@3716.18,7824.53 3716.18,7904.72 3800.16,7988.7 4289.69,7988.7 4351.18,8050.2 4351.18,8174.53 C14.A.2@4281.18,8174.53 R14.A.2@4181.18,8174.53
VREG2.B: C12.B.2 C14.B.2 C19.B.2 R11.B.1 R12.B.1 R14.B.2 U2.B.9 U3.B.7 | length 2114
  Top Layer w6: R12.B.1@4619.53,7823.03 R11.B.1@4744.53,7823.03 ; R11.B.1@4759.53,7823.03 R11.B.1@4744.53,7823.03 ; R11.B.1@4772.13,7835.63 4744.53,7835.63 R11.B.1@4744.53,7823.03 ; U2.B.9@4932.03,7605.12 4932.03,7663.13 4872.13,7723.03 C12.B.2@4744.53,7723.03 R11.B.1@4744.53,7823.03
  Top Layer w40: R12.B.1@4619.53,7823.03 4619.53,7903.23 4645,7928.7 5645,7928.7 5724.53,8008.23 5724.53,8173.03 R14.B.2@5554.53,8173.03
VREG2.C: C12.C.2 C14.C.2 C19.C.2 R11.C.1 R12.C.1 R14.C.2 U2.C.9 U3.C.7 | length 1656.7
  Top Layer w6: R12.C.1@6444.76,7821.1 R11.C.1@6569.76,7821.1 ; R11.C.1@6584.76,7821.1 R11.C.1@6569.76,7821.1 ; R11.C.1@6597.36,7833.7 6569.76,7833.7 R11.C.1@6569.76,7821.1 ; U2.C.9@6757.27,7603.19 6757.26,7661.2 6697.36,7721.1 C12.C.2@6569.76,7721.1 R11.C.1@6569.76,7821.1
  Top Layer w40: R12.C.1@6444.76,7821.1 6444.76,7901.3 6522.17,7978.7 7059.69,7978.7 7099.76,8018.78 7099.76,8171.1 R14.C.2@6929.76,8171.1
VREG2.D: C12.D.2 C14.D.2 C19.D.2 R11.D.1 R12.D.1 R14.D.2 U2.D.9 U3.D.7 | length 1517.1
  Top Layer w6: R12.D.1@7919.68,7876.1 R11.D.1@8044.68,7876.1 ; R11.D.1@8059.68,7876.1 R11.D.1@8044.68,7876.1 ; R11.D.1@8072.28,7888.7 8044.68,7888.7 R11.D.1@8044.68,7876.1 ; U2.D.9@8232.18,7658.19 8232.18,7716.2 8172.28,7776.1 C12.D.2@8044.68,7776.1 R11.D.1@8044.68,7876.1
  Top Layer w40: R12.D.1@7919.68,7876.1 7919.68,7956.3 7972.76,8009.37 8430.35,8009.37 8476.14,8055.16 8476.14,8174.17 R14.D.2@8306.14,8174.17
VREG2.E: C12.E.2 C14.E.2 C19.E.2 R11.E.1 R12.E.1 R14.E.2 U2.E.9 U3.E.7 | length 1043.3
  Top Layer w6: R12.E.1@9794.76,7876.1 R11.E.1@9919.76,7876.1 ; R11.E.1@9934.76,7876.1 R11.E.1@9919.76,7876.1 ; R11.E.1@9947.36,7888.7 R11.E.1@9932.36,7888.7 9919.76,7888.7 R11.E.1@9919.76,7876.1 ; U2.E.9@10107.27,7658.19 10107.26,7716.2 10047.36,7776.1 C12.E.2@9919.76,7776.1 R11.E.1@9919.76,7876.1
  Top Layer w40: R14.E.2@9679.76,8176.1 C14.E.2@9779.76,8176.1 9849.76,8176.1 9849.76,8011.3 9794.76,7956.3 R12.E.1@9794.76,7876.1
VVAR: C1.E.2 Q1.E.S2 Q2.E.S1 R19.1 U2.E.14 U2.E.23 U4.VCC | length 3288.6
  Top Layer w6: R19.1@9268.03,7798.7 9268.03,7674.13 U4.VCC@9276.46,7665.71
  Top Layer w10: U4.VCC@9276.46,7665.71 9276.46,7561.93 9359.69,7478.7 U4.VCC@9449.69,7478.7 9539.69,7478.7 9622.91,7561.93 U4.VCC@9622.91,7665.71 ; Q2.E.S1@9781.97,7450.51 9781.97,7288.34 C1.E.2@9807.56,7313.94 ; Q2.E.S1@9807.56,7450.51 C1.E.2@9807.56,7313.94 ; U2.E.14@10057.27,7469.21 10057.27,7394.95 10031.01,7368.69 9862.32,7368.69 C1.E.2@9807.56,7313.94 ; U2.E.23@10282.27,7469.21 10282.27,7421.2 10304.77,7398.7 10534.77,7398.7 ; Q1.E.S2@10531.97,7450.51 10531.97,7401.5 10534.77,7398.7 ; Q1.E.S2@10557.56,7450.51 10557.56,7414.65 10541.62,7398.7 10534.77,7398.7
  Top Layer w40: U4.VCC@9539.69,7478.7 9591.61,7478.7 9781.97,7288.34 C1.E.2@9791.61,7278.7 9794.77,7275.55 9794.77,7212.68 9894.77,7112.68 10444.77,7112.68 10541.62,7209.53 10541.62,7387.68
VVAR_EN1: R6.E.2 R9.E.1 U1.E.3 U12.27 | length 2332.9
  Top Layer w6: U12.27@9047.65,7100.87 9055.38,7108.6 9087.52,7108.6 9207.01,7228.09 9207.01,7791.69 9297.01,7881.69 9647.01,7881.69 v2(9767.01,8001.69) ; v2(10067.01,8241.69) 10069.76,8238.94 R9.E.1@10069.76,8176.1
  Top Layer w10: R6.E.2@9969.76,8176.1 R9.E.1@10069.76,8176.1 10119.77,8226.1 U1.E.3@10119.76,8476.1
  Bottom Layer w6: v2(9767.01,8001.69) 9767.01,8041.69 9967.01,8241.69 v2(10067.01,8241.69)
VVAR_EN2: R15.E.2 R18.E.1 U3.E.3 U12.28 | length 1739.1
  Top Layer w6: U12.28@9047.65,7126.46 9167.01,7245.82 v2(9167.01,7621.69) ; v2(9377.01,8241.69) 9377.01,8178.86 R18.E.1@9379.76,8176.1
  Top Layer w10: R15.E.2@9279.76,8176.1 R18.E.1@9379.76,8176.1 9392.26,8188.6 9429.76,8226.1 U3.E.3@9429.76,8476.1
  Bottom Layer w6: v2(9167.01,7621.69) 9167.01,8031.69 v2(9377.01,8241.69)
VVAR_FAULT1: U2.E.21 U12.22 | length 1465.4
  Top Layer w6: U12.22@9047.65,6972.92 9317.35,6972.92 v2(9446.57,7102.13) ; v2(10180.96,7533.72) 10191.41,7523.27 10215.43,7523.27 10232.27,7506.44 U2.E.21@10232.27,7469.21
  Bottom Layer w6: v2(9446.57,7102.13) 9531.72,7187.28 9803.6,7187.28 10150.04,7533.72 v2(10180.96,7533.72)
VVAR_FAULT2: U2.E.16 U12.23 | length 1454.3
  Top Layer w6: U12.23@9047.65,6998.51 9303.38,6998.51 v2(9407.01,7102.13) ; U2.E.16@10107.27,7469.21 10107.27,7523.27 10114.56,7523.27 v2(10152.99,7561.69)
  Bottom Layer w6: v2(9407.01,7102.13) 9517.75,7212.87 9804.17,7212.87 v2(10152.99,7561.69)
VVAR_FB1: C5.E.1 R5.E.1 R7.E.2 R8.E.2 R35.2 R36.2 R37.2 R38.2 U1.E.6 | length 2316.6
  Top Layer w6: R36.2@9104.41,7371.69 R35.2@9104.41,7451.69 R37.2@9104.41,7531.69 R38.2@9104.41,7611.69 9177.01,7684.29 9177.01,7808.66 9280.04,7911.69 9627.01,7911.69 9747.01,8031.69 v2(9807.01,8031.69) ; v2(10237.01,8051.69) 10257.17,8071.85 R8.E.2@10257.17,8113.7
  Top Layer w10: U1.E.6@10269.76,8476.1 10269.77,8388.7 10309.76,8348.7 10309.76,8266.3 R7.E.2@10257.17,8213.7 R8.E.2@10257.17,8113.7 10269.57,8101.3 C5.E.1@10469.76,8101.3
  Bottom Layer w6: v2(9807.01,8031.69) 10217.01,8031.69 v2(10237.01,8051.69)
VVAR_FB2: C14.E.1 R14.E.1 R16.E.2 R17.E.2 R39.2 R40.2 R41.2 R42.2 U3.E.6 | length 1396.6
  Top Layer w6: R39.2@9104.41,7691.69 R40.2@9104.41,7771.69 R41.2@9104.41,7851.69 R42.2@9104.41,7931.69 9385.16,7931.69 R16.E.2@9567.17,8113.7
  Top Layer w10: U3.E.6@9579.76,8476.1 9579.77,8388.7 9619.76,8348.7 9619.76,8266.3 R17.E.2@9567.17,8213.7 R16.E.2@9567.17,8113.7 9579.57,8101.3 C14.E.1@9779.76,8101.3
VVAR_PWRGD1: U2.E.22 U12.21 | length 1550.1
  Top Layer w6: U12.21@9047.65,6947.33 9331.32,6947.33 v2(9446.57,7062.57) ; v2(10208.93,7561.69) 10210.81,7561.69 10257.27,7515.24 U2.E.22@10257.27,7469.21
  Bottom Layer w6: v2(9446.57,7062.57) 9545.69,7161.69 9808.51,7161.69 10157.76,7510.94 10190.39,7510.94 10203.74,7524.28 10203.74,7551.96 10201.47,7554.23 v2(10208.93,7561.69)
VVAR_PWRGD2: U2.E.15 U12.24 | length 1370.6
  Top Layer w6: U12.24@9047.65,7024.1 9289.41,7024.1 v2(9407.01,7141.69) ; U2.E.15@10082.27,7469.21 10082.27,7523.27 10107.01,7548.01 v2(10107.01,7551.69)
  Bottom Layer w6: v2(9407.01,7141.69) 9503.78,7238.46 9793.78,7238.46 v2(10107.01,7551.69)
VVAR_TX1: U4.OUT1 | length 2051.4
  Top Layer w6: 9693.39,6255.63 9746.93,6255.63
  Top Layer w10: U4.OUT1@9276.46,7291.69 9276.46,7243.19 9307.95,7211.69 U4.OUT1@9307.95,7291.69 ; 9339.45,7211.69 U4.OUT1@9339.45,7291.69 ; 9370.94,7211.69 U4.OUT1@9370.94,7291.69 ; 9402.44,7211.69 U4.OUT1@9402.44,7291.69 ; 9433.94,7204.76 U4.OUT1@9433.94,7291.69
  Top Layer w40: 9307.95,7211.69 9339.45,7211.69 9370.94,7211.69 9402.44,7211.69 9427.01,7211.69 9433.94,7204.76 9687.32,6951.38 9687.32,5940.67
VVAR_TX1_EN: U4.IN1 U12.26 | length 1199.4
  Top Layer w6: U12.26@9047.65,7075.28 9200.59,7075.28 v2(9207.01,7081.69) ; U4.IN1@9465.43,7665.71 9465.43,7713.27 9517.42,7765.25 v2(9547.01,7765.25)
  Bottom Layer w6: v2(9207.01,7081.69) 9207.01,7531.69 9440.57,7765.25 v2(9547.01,7765.25)
VVAR_TX2: U4.OUT2 | length 2268.3
  Top Layer w6: 10277.87,6249.57 10283.94,6255.63 10337.48,6255.63
  Top Layer w10: U4.OUT2@9465.43,7291.69 9465.43,7233.27 9485.43,7213.27 9496.93,7213.27 U4.OUT2@9496.93,7291.69 ; 9528.43,7213.27 U4.OUT2@9528.43,7291.69 ; 9559.92,7213.27 U4.OUT2@9559.92,7291.69 ; 9591.42,7213.27 U4.OUT2@9591.42,7291.69 ; 9622.91,7213.27 U4.OUT2@9622.91,7291.69
  Top Layer w40: 9496.93,7213.27 9528.43,7213.27 9559.92,7213.27 9591.42,7213.27 9622.91,7213.27 9701.34,7213.27 10277.87,6636.73 10277.87,6249.57 10277.87,5940.67
VVAR_TX2_EN: U4.IN2 U12.25 | length 1125.8
  Top Layer w6: U12.25@9047.65,7049.69 9094.8,7049.69 9103.08,7057.96 v2(9230.74,7057.96) ; U4.IN2@9528.43,7665.71 9528.43,7713.27 9546.85,7731.69 v2(9547.01,7731.69)
  Bottom Layer w6: v2(9230.74,7057.96) 9230.74,7519.23 9443.2,7731.69 v2(9547.01,7731.69)
WE: U101.179 U102.11 U103.17 | length 2421.8
  Top Layer w5.91: U103.17@3192.99,2786.54 3192.99,2890.87 3221.54,2919.41 3221.54,3182.2 3195.94,3207.8 U102.11@2987.28,3207.8 2948.9,3207.8 2909.53,3247.17 2909.53,3429.34 2937,3456.81 3812.09,3456.81 3858.35,3410.55 3858.35,3103.74 3970.83,2991.26 U101.179@4018.78,2991.26
pads on no net: S1.0 S1.2 S3.0 S3.2 S3.8 S3.9 U4.3 U4.5 U4.7 U4.9 U5.3 U5.5 U5.7 U5.9 U6.3 U6.5 U6.7 U6.9 U7.3 U7.5 U7.7 U7.9 U8.11 U8.14 U8.19 U8.20 U9.11 U9.14 U9.19 U9.20 U12.11 U12.14 U12.19 U12.20 U13.4 U101.5 U101.11 U101.12 U101.14 U101.16 U101.18 U101.19 U101.25 U101.30 U101.31 U101.37 U101.39 U101.40 U101.41 U101.42 U101.43 U101.45 U101.47 U101.49 U101.51 U101.52 U101.53 U101.61 U101.62 U101.75 U101.85 U101.87 U101.88 U101.90 U101.91 U101.92 U101.117 U101.137 U101.141 U101.143 U101.147 U101.151 U101.153 U101.156 U101.157 U101.158 U101.160 U101.161 U101.162 U101.163 U101.164 U101.166 U101.167 U101.168 U101.170 U101.171 U101.175 U101.176 U101.177 U101.178 U101.180 U101.182 U101.184 U101.185 U101.186 U101.188 U101.190 U101.192 U101.194 U101.195 U101.196 U101.203 U102.10 U102.13 U201.1 U201.12 U201.15 U201.17 U201.18 U201.19 U201.20 U201.21 U201.22 U201.26 U211.A.1 U211.A.15 U211.B.1 U211.B.15 U221.A.7 U221.A.9 U221.A.16 U221.B.7 U221.B.9 U221.B.16
copper on no net: | length 3149
  Top Layer w6: 3015.67,6709.96 3369.61,6709.96 ; v2(3169.21,7558.39) 3224.33,7558.39 ; 3299.13,7558.39 3397.56,7558.39 ; 3299.13,7659.96 3397.56,7659.96 ; 3299.13,7741.54 3397.56,7741.54 ; v2(3310.94,8681.85) 3310.94,8736.97 ; 3310.94,8811.77 3310.94,8910.2 ; v2(3370,6438.7) 3370,6493.82 ; 3370,6568.62 3370,6667.05 ; 3884.72,6255.63 3983.15,6255.63 ; 4057.95,6255.63 v2(4113.07,6255.63) ; 4475.28,6255.63 4573.7,6255.63 ; 4648.5,6255.63 v2(4703.62,6255.63) ; 5065.83,6255.63 5164.25,6255.63 ; 5239.06,6255.63 v2(5294.17,6255.63) ; 5656.38,6255.63 5754.8,6255.63 ; 5829.61,6255.63 v2(5884.72,6255.63) ; 6246.93,6255.63 6345.35,6255.63 ; 6420.16,6255.63 v2(6475.28,6255.63) ; 6837.48,6255.63 6935.91,6255.63 ; 7010.71,6255.63 v2(7065.83,6255.63) ; 7428.03,6255.63 7526.46,6255.63 ; 7601.26,6255.63 v2(7656.38,6255.63) ; 8018.58,6255.63 8117.01,6255.63 ; 8191.81,6255.63 v2(8246.93,6255.63) ; 8609.13,6255.63 8707.56,6255.63 ; 8782.36,6255.63 v2(8837.48,6255.63) ; 9199.68,6255.63 9298.11,6255.63 ; 9372.91,6255.63 v2(9428.03,6255.63) ; 9790.24,6255.63 9888.66,6255.63 ; 9963.46,6255.63 v2(10018.58,6255.63) ; 10380.79,6255.63 10479.21,6255.63 ; 10554.02,6255.63 v2(10609.13,6255.63)
  Bottom Layer w6: 2887.01,6951.69 3015.67,6823.03 3015.67,6709.96
  other v2: 2897.56,5448.54 3291.26,5448.54 3684.96,5448.54 4078.66,5448.54 4472.36,5448.54 4866.06,5448.54 5259.76,5448.54 5653.46,5448.54 6047.17,5448.54 6440.87,5448.54 6834.57,5448.54 7228.27,5448.54 7621.97,5448.54 8015.67,5448.54 8409.37,5448.54 8803.07,5448.54 9196.77,5448.54 9590.47,5448.54 9984.17,5448.54 10377.87,5448.54 2503.86,5842.24 10968.43,5842.24 2503.86,6235.94 10968.43,6235.94 2503.86,6629.65 10968.43,6629.65 2503.86,7023.35 10968.43,7023.35 2503.86,7417.05 10968.43,7417.05 2503.86,7810.75 10968.43,7810.75 2503.86,8204.45 10968.43,8204.45 2503.86,8598.15 10968.43,8598.15 2503.86,8991.85 10968.43,8991.85 2897.56,9385.55 3291.26,9385.55 3684.96,9385.55 4078.66,9385.55 4472.36,9385.55 4866.06,9385.55 5259.76,9385.55 5653.46,9385.55 6047.17,9385.55 6440.87,9385.55 6834.57,9385.55 7228.27,9385.55 7621.97,9385.55 8015.67,9385.55 8409.37,9385.55 8803.07,9385.55 9196.77,9385.55 9590.47,9385.55 9984.17,9385.55 10377.87,9385.55
  other v4: 5561.57,7377.83 5608.82,7377.83 5656.06,7377.83 5703.31,7377.83 5750.55,7377.83 5797.8,7377.83 6011.57,7377.83 6058.82,7377.83 6106.06,7377.83 6153.31,7377.83 6200.55,7377.83 6247.8,7377.83 9331.57,7407.83 9378.82,7407.83 9426.06,7407.83 9473.31,7407.83 9520.55,7407.83 9567.8,7407.83 7401.57,7417.83 7448.82,7417.83 7496.06,7417.83 7543.31,7417.83 7590.55,7417.83 7637.8,7417.83 5561.57,7425.08 5608.82,7425.08 5656.06,7425.08 5703.31,7425.08 5750.55,7425.08 5797.8,7425.08 6011.57,7425.08 6058.82,7425.08 6106.06,7425.08 6153.31,7425.08 6200.55,7425.08 6247.8,7425.08 9331.57,7455.08 9378.82,7455.08 9426.06,7455.08 9473.31,7455.08 9520.55,7455.08 9567.8,7455.08 7401.57,7465.08 7448.82,7465.08 7496.06,7465.08 7543.31,7465.08 7590.55,7465.08 7637.8,7465.08 5561.57,7472.32 5608.82,7472.32 5656.06,7472.32 5703.31,7472.32 5750.55,7472.32 5797.8,7472.32 6011.57,7472.32 6058.82,7472.32 6106.06,7472.32 6153.31,7472.32 6200.55,7472.32 6247.8,7472.32 9331.57,7502.32 9378.82,7502.32 9426.06,7502.32 9473.31,7502.32 9520.55,7502.32 9567.8,7502.32 7401.57,7512.32 7448.82,7512.32 7496.06,7512.32 7543.31,7512.32 7590.55,7512.32 7637.8,7512.32 5561.57,7519.57 5608.82,7519.57 5656.06,7519.57 5703.31,7519.57 5750.55,7519.57 5797.8,7519.57 6011.57,7519.57 6058.82,7519.57 6106.06,7519.57 6153.31,7519.57 6200.55,7519.57 6247.8,7519.57 9331.57,7549.57 9378.82,7549.57 9426.06,7549.57 9473.31,7549.57 9520.55,7549.57 9567.8,7549.57 7401.57,7559.57 7448.82,7559.57 7496.06,7559.57 7543.31,7559.57 7590.55,7559.57 7637.8,7559.57

## Polygon pours and split planes (outlines as drawn)
no net on Top Layer "Top Layer-No Net" (solid, remove dead copper, pour order 43): 4371.18,8027.13 4521.18,8027.13 4521.18,8387.13 4551.18,8417.13 4551.18,8547.13 4541.18,8547.13 4491.18,8597.13 4371.18,8597.13 4371.18,8937.13 4211.18,8937.13 4211.18,8597.13 4321.18,8487.13 4381.18,8427.13 4381.18,8407.13
no net on Top Layer "Top Layer-No Net" (solid, remove dead copper, pour order 34): 5204.53,8028.23 5204.53,8378.23 5244.53,8418.23 5244.53,8538.23 5114.53,8538.23 5034.53,8618.23 5034.53,8925.63 4924.53,8925.63 4924.53,8515.63 5054.53,8388.23 5054.53,8028.23
no net on Top Layer "Top Layer-No Net" (solid, remove dead copper, pour order 45): 7119.76,8023.7 7269.76,8023.7 7269.76,8383.7 7299.76,8413.7 7299.76,8543.7 7289.76,8543.7 7239.76,8593.7 7119.76,8593.7 7119.76,8933.7 6959.76,8933.7 6959.76,8593.7 7069.76,8483.7 7129.76,8423.7 7129.76,8403.7
no net on Top Layer "Top Layer-No Net" (solid, remove dead copper, pour order 47): 9869.76,8028.7 10019.76,8028.7 10019.76,8388.7 10049.76,8418.7 10049.76,8548.7 10039.76,8548.7 9989.76,8598.7 9869.76,8598.7 9869.76,8938.7 9709.76,8938.7 9709.76,8598.7 9819.76,8488.7 9879.76,8428.7 9879.76,8408.7
no net on Top Layer "Top Layer-No Net" (solid, remove dead copper, pour order 52): 9183.39,8375.67 8993.39,8375.67 8983.39,8365.63 7813.39,8365.63 7813.39,8787.11 7683.39,8917.56 7683.39,9108.23 9183.39,9108.23
no net on Top Layer "Top Layer-No Net" (solid, remove dead copper, pour order 33): 3831.18,8029.72 3831.18,8379.72 3871.18,8419.72 3871.18,8539.72 3741.18,8539.72 3661.18,8619.72 3661.18,8927.13 3551.18,8927.13 3551.18,8517.13 3681.18,8389.72 3681.18,8029.72
no net on Top Layer "Top Layer-No Net" (solid, remove dead copper, pour order 44): 5744.53,8025.63 5894.53,8025.63 5894.53,8385.63 5924.53,8415.63 5924.53,8545.63 5914.53,8545.63 5864.53,8595.63 5744.53,8595.63 5744.53,8935.63 5584.53,8935.63 5584.53,8595.63 5694.53,8485.63 5754.53,8425.63 5754.53,8405.63
no net on Top Layer "Top Layer-No Net" (solid, remove dead copper, pour order 50): 7810.91,8378.74 7620.91,8378.74 7610.91,8368.7 6440.91,8368.7 6440.91,8790.18 6310.91,8920.63 6310.91,9111.3 7810.91,9111.3
no net on Top Layer "Top Layer-No Net" (solid, remove dead copper, pour order 37): 9329.76,8031.3 9329.76,8381.3 9369.76,8421.3 9369.76,8541.3 9239.76,8541.3 9159.76,8621.3 9159.76,8928.7 9049.76,8928.7 9049.76,8518.7 9179.76,8391.3 9179.76,8031.3
no net on Top Layer "Top Layer-No Net" (solid, remove dead copper, pour order 38): 4346.38,8129.72 4081.18,8129.72 4071.18,8119.72 4051.18,8139.72 4051.18,8519.72 4181.18,8519.72 4181.18,8369.72 4371.18,8369.72 4371.18,8129.72
no net on Top Layer "Top Layer-No Net" (solid, remove dead copper, pour order 51): 10559.76,8378.74 10369.76,8378.74 10359.76,8368.7 9189.76,8368.7 9189.76,8790.18 9059.76,8920.63 9059.76,9111.3 10559.76,9111.3
no net on Top Layer "Top Layer-No Net" (solid, remove dead copper, pour order 40): 7094.96,8126.3 6829.76,8126.3 6819.76,8116.3 6799.76,8136.3 6799.76,8516.3 6929.76,8516.3 6929.76,8366.3 7119.76,8366.3 7119.76,8126.3
no net on Top Layer "Top Layer-No Net" (solid, remove dead copper, pour order 42): 9844.96,8131.3 9579.76,8131.3 9569.76,8121.3 9549.76,8141.3 9549.76,8521.3 9679.76,8521.3 9679.76,8371.3 9869.76,8371.3 9869.76,8131.3
no net on Top Layer "Top Solder-No Net" (solid, remove dead copper, pour order 27): 4796.18,8537.13 4796.18,8362.13 4821.18,8337.13 4821.18,8274.72 4821.18,8137.13 5021.18,8137.13 5046.18,8137.52 5046.18,8337.13 4871.18,8337.13 4846.18,8362.13 4846.18,8537.13
no net on Top Layer "Top Layer-No Net" (solid, remove dead copper, pour order 49): 6436.42,8375.23 6246.42,8375.23 6236.42,8365.2 5066.42,8365.2 5066.42,8786.67 4936.42,8917.13 4936.42,9107.8 6436.42,9107.8
no net on Top Layer "Top Layer-No Net" (solid, remove dead copper, pour order 46): 8496.14,8026.77 8646.14,8026.77 8646.14,8386.77 8676.14,8416.77 8676.14,8546.77 8666.14,8546.77 8616.14,8596.77 8496.14,8596.77 8496.14,8936.77 8336.14,8936.77 8336.14,8596.77 8446.14,8486.77 8506.14,8426.77 8506.14,8406.77
no net on Top Layer "Top Solder-No Net" (solid, remove dead copper, pour order 28): 6169.53,8535.63 6169.53,8360.63 6194.53,8335.63 6194.53,8273.23 6194.53,8135.63 6394.53,8135.63 6419.53,8136.02 6419.53,8335.63 6244.53,8335.63 6219.53,8360.63 6219.53,8535.63
no net on Top Layer "Top Layer-No Net" (solid, remove dead copper, pour order 36): 7956.14,8029.37 7956.14,8379.37 7996.14,8419.37 7996.14,8539.37 7866.14,8539.37 7786.14,8619.37 7786.14,8926.77 7676.14,8926.77 7676.14,8516.77 7806.14,8389.37 7806.14,8029.37
no net on Top Layer "Top Layer-No Net" (solid, remove dead copper, pour order 39): 5719.73,8128.23 5454.53,8128.23 5444.53,8118.23 5424.53,8138.23 5424.53,8518.23 5554.53,8518.23 5554.53,8368.23 5744.53,8368.23 5744.53,8128.23
no net on Top Layer "Top Solder-No Net" (solid, remove dead copper, pour order 29): 7547.79,8538.27 7547.79,8363.27 7572.79,8338.27 7572.79,8275.87 7572.79,8138.27 7772.79,8138.27 7797.79,8138.66 7797.79,8338.27 7622.79,8338.27 7597.79,8363.27 7597.79,8538.27
no net on Top Layer "Top Layer-No Net" (solid, remove dead copper, pour order 35): 6579.76,8026.3 6579.76,8376.3 6619.76,8416.3 6619.76,8536.3 6489.76,8536.3 6409.76,8616.3 6409.76,8923.7 6299.76,8923.7 6299.76,8513.7 6429.76,8386.3 6429.76,8026.3
no net on Top Layer "Top Layer-No Net" (solid, remove dead copper, pour order 48): 5061.18,8377.16 4871.18,8377.16 4861.18,8367.13 3691.18,8367.13 3691.18,8788.6 3561.18,8919.06 3561.18,9109.72 5061.18,9109.72
no net on Top Layer "Top Layer-No Net" (solid, remove dead copper, pour order 41): 8471.34,8129.37 8206.14,8129.37 8196.14,8119.37 8176.14,8139.37 8176.14,8519.37 8306.14,8519.37 8306.14,8369.37 8496.14,8369.37 8496.14,8129.37
no net on Top Layer "Top Solder-No Net" (solid, remove dead copper, pour order 32): 8926.14,8536.76 8926.14,8361.76 8951.14,8336.76 8951.14,8274.36 8951.14,8136.76 9151.14,8136.76 9191.06,8136.76 9191.06,8336.76 9001.14,8336.76 8976.14,8361.76 8976.14,8536.76